# Altium PCB PowerBoard_Rev2.PcbDoc
Units mm, origin at the board's own origin, x right, y up, seen from the top; angles counter-clockwise.
Board outline 76.58 x 61.09 mm, 2 copper layers (Top Layer, Bottom Layer); 50 components, 29 nets, 175 pads, 37 vias.
Unrouted connection lines stored in the file: 1.
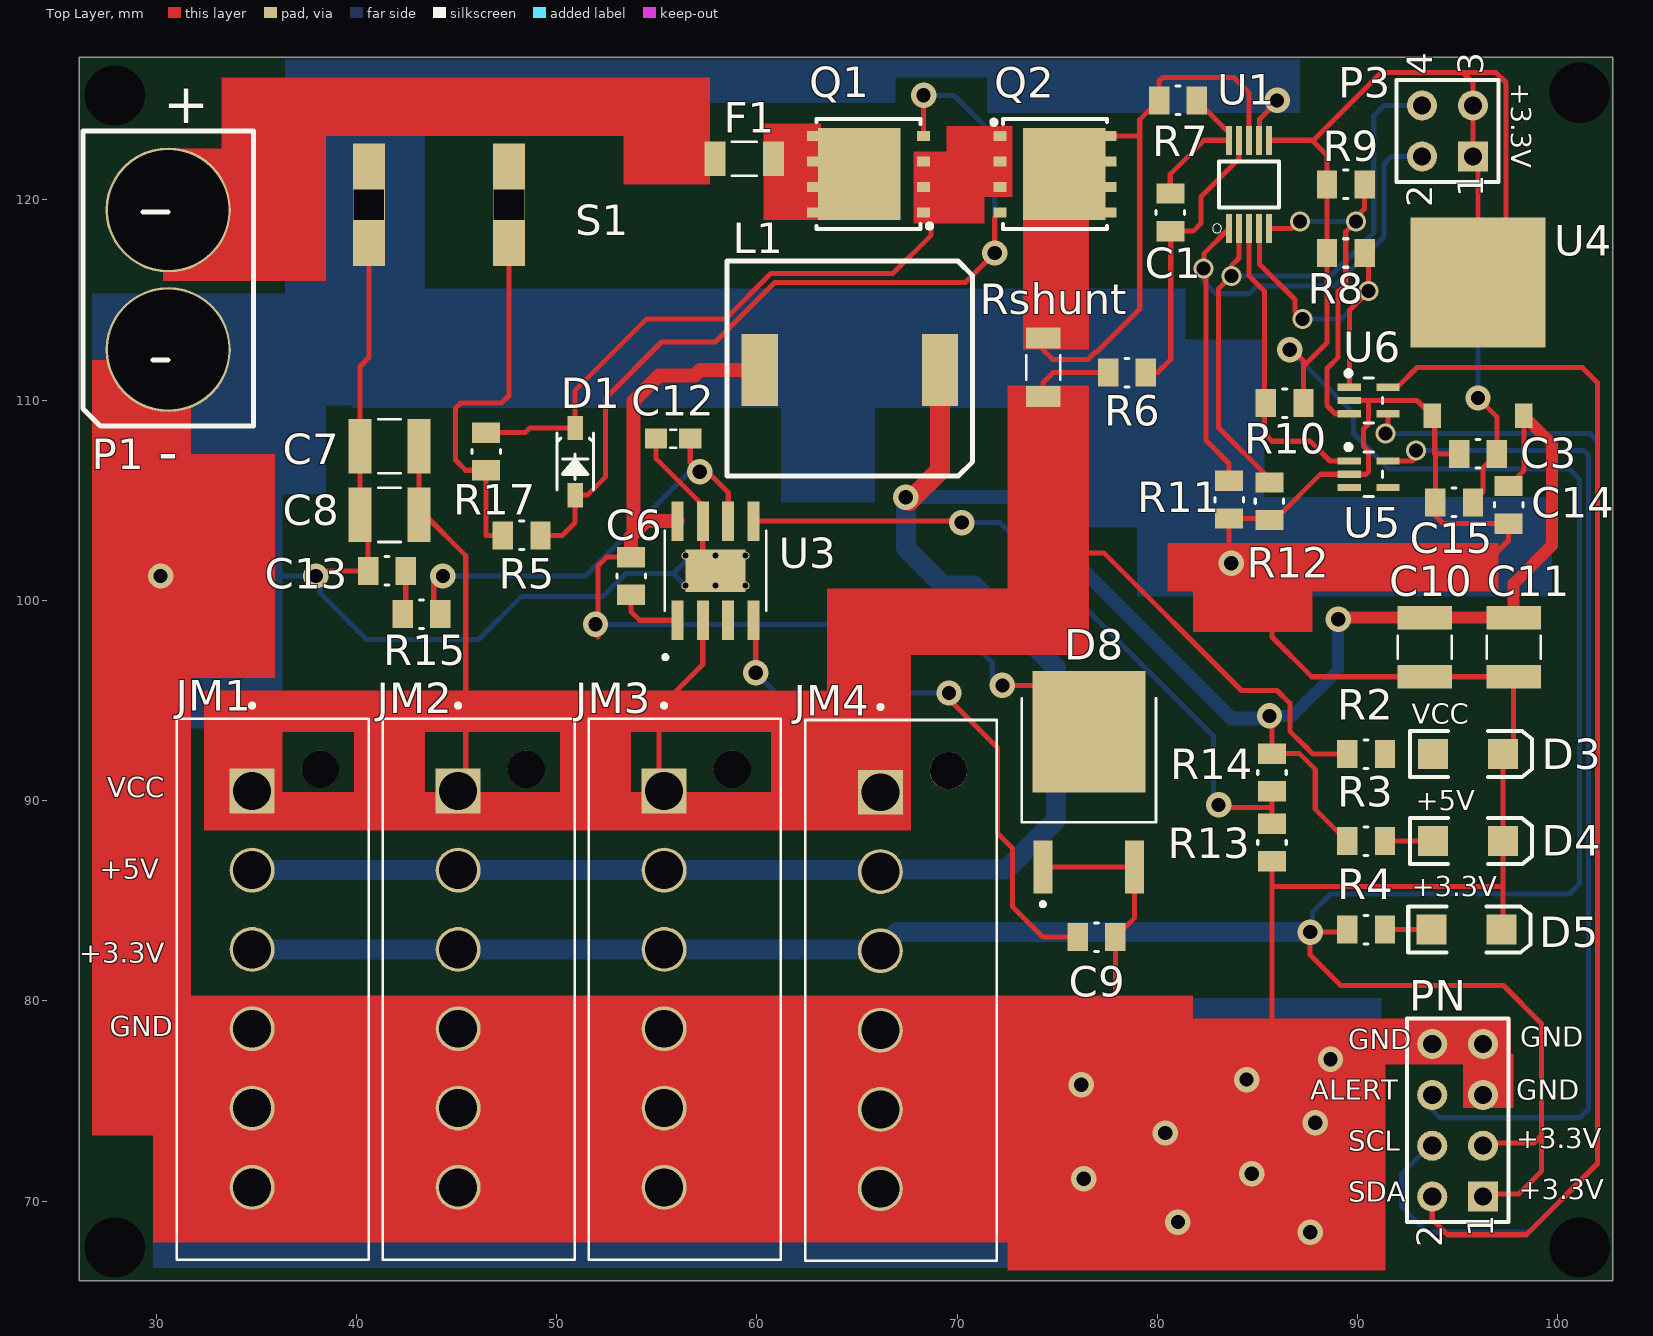
[diagram p0: Top Layer view]
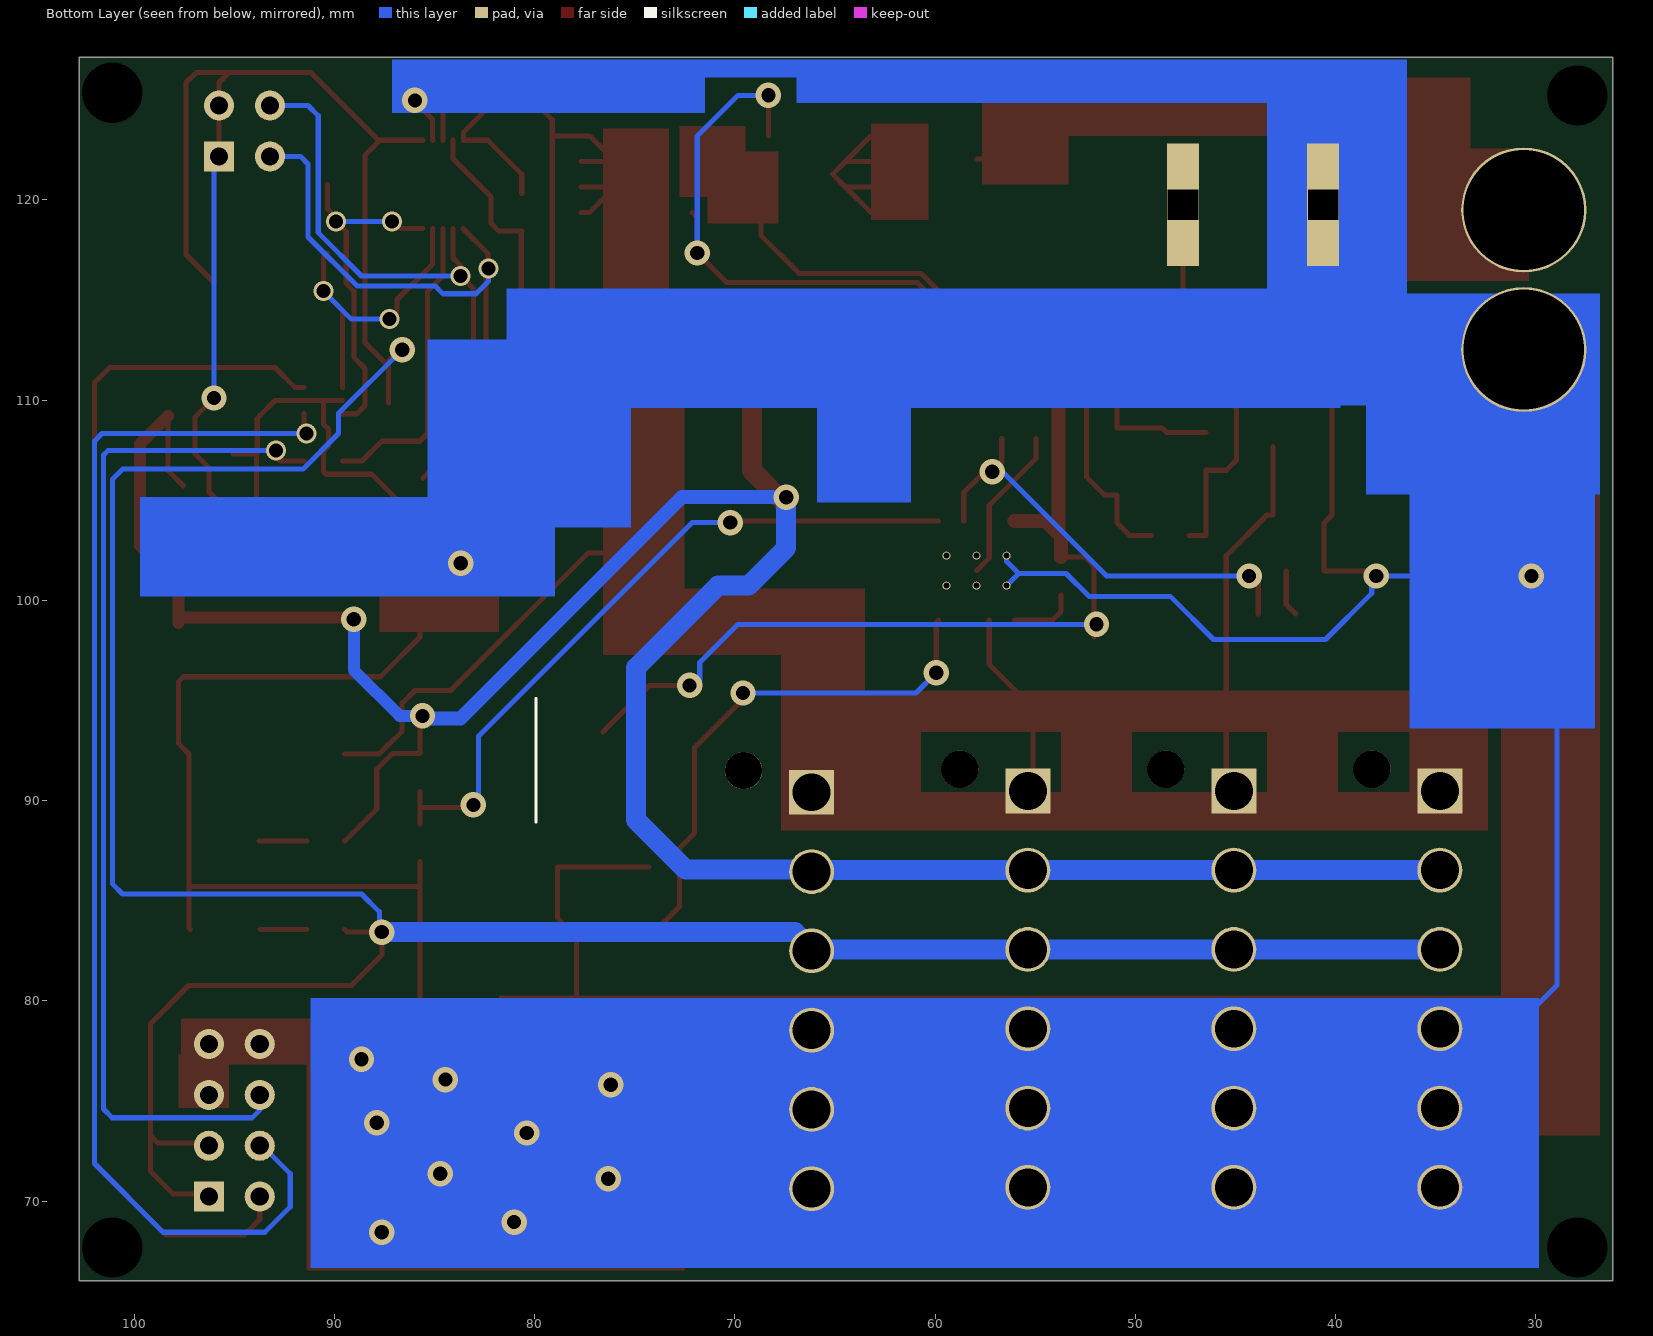
[diagram p1: Bottom Layer view, seen from below]

## Layer stack, top to bottom
Top Solder: solder mask 0.0102, Solder Resist, Dk 3.5
Top Layer: signal copper 0.0356
Dielectric 1: dielectric 0.32, FR-4, Dk 4.8
Bottom Layer: signal copper 0.0356
Bottom Solder: solder mask 0.0102, Solder Resist, Dk 3.5

## Board outline
102.743,127.127 102.743,66.04 26.162,66.04 26.162,127.127

## Design rules (kind name [scope] priority, off if disabled: settings)
Clearance [All] p1: gap=0.2 ignorepadtopadclearanceinfootprint=FALSE except(0: Arc-Hole Track-Hole SMDPad-Hole THPad-Hole Via-Hole Fill-Hole Poly-Hole Region-Hole Text-Hole)
ComponentClearance [All] p1: gap=0.15 collisioncheckmode=3 verticalgap=0.254 showdistances=FALSE
PolygonConnect [All] p1: connectstyle=Relief reliefconductorwidth=0.254 reliefentries=4 polygonreliefangle="90 Angle" airgapwidth=0.254
RoutingVias [All] p1: holewidth=0.711 width=1.27 viastyle="Through Hole" minholewidth=0.5 minwidth=0.8 maxholewidth=4 maxwidth=3
SolderMaskExpansion [All] p1: expansion=0.102
Width [All] p1: maxlimit=2 minlimit=0.2 preferedwidth=0.254
29 further rules are at their usual default settings.

## Components (designator, comment, footprint, x,y, rotation, side; value= is the part's Value field where it differs from the comment)
C1 "100nF" 0805 80.645,119.38 r270 top
C3 "100nF" 0805 96.012,107.315 r0 top
C6 "100nF" 0805 53.721,101.219 r90 top
C7 "10uF" 1210 41.656,107.696 r0 top
C8 "10uF" 1210 41.656,104.267 r0 top
C9 "8.2nF" 0805 76.962,83.185 r0 top
C10 "47uF" 1210 93.345,97.663 r90 top
C11 "47uF" 1210 97.79,97.663 r90 top
C12 "10pF" 0603 55.825,108.077 r0 top
C13 "1nF" 0805 41.529,101.473 r0 top
C14 "4.7uF" 0805 97.536,104.775 r90 top
C15 "4.7uF" 0805 94.818,104.902 r0 top
D1 "MMSZ5245B-TP" SOD-123 50.927,106.934 r270 top
D3 "LED2" 3.2X1.6X1.1 95.504,92.329 r0 top
D4 "LED2" 3.2X1.6X1.1 95.504,87.978 r0 top
D5 "LED2" 3.2X1.6X1.1 95.428,83.566 r0 top
D8 "SBRD10200TR" DPAK 76.581,90.932 r0 top
F1 "Fuse 20A 1206" 1206 59.373,122.047 r0 top
JM1 "CONN HEADER VERT 6POS 3.96MM" "CN HDR 6POS 3.96MM" 34.798,90.493 r270 top (schematic designator JM3)
JM2 "CONN HEADER VERT 6POS 3.96MM" "CN HDR 6POS 3.96MM" 45.085,90.493 r270 top (schematic designator JM1)
JM3 "CONN HEADER VERT 6POS 3.96MM" "CN HDR 6POS 3.96MM" 55.372,90.493 r270 top (schematic designator JM4)
JM4 "CONN HEADER VERT 6POS 3.96MM" "CN HDR 6POS 3.96MM" 66.167,90.424 r270 top (schematic designator JM2)
L1 "SRU1048-8R2Y" Inductor 64.643,111.506 r0 top value=8.2uH
P1 "XT60" XT60Connector 26.357,107.95 r90 top value=N/A
P3 "Header 2X2" HDR2X2 95.758,122.174 r90 top
PN "Header 4X2" HDR2X4 96.266,70.231 r90 top
Q1 "AON6407" 8-PowerSMD 65.576,121.285 r180 top
Q2 "AON6407" 8-PowerSMD 74.886,121.285 r0 top
R2 "1.96K" 0805 90.424,92.329 r0 top value=1.96k
R3 "270" 0805 90.424,87.978 r0 top
R4 "110" 0805 90.424,83.566 r0 top
R5 "100k" 0805 48.26,103.251 r180 top
R6 "10" 0805 78.486,111.379 r180 top
R7 "10" 0805 81.026,124.968 r180 top
R8 "10k" 0805 89.408,117.348 r0 top
R9 "10k" 0805 89.408,120.777 r0 top
R10 "10k" 0805 86.36,109.855 r180 top
R11 "10k" 0805 83.582,105.029 r270 top
R12 "10k" 0805 85.598,104.953 r270 top
R13 "1.96K" 0805 85.725,87.908 r270 top value=1.96k
R14 "10.2k" 0805 85.725,91.407 r270 top
R15 "24.3K" 0805 43.256,99.314 r180 top value=24.3k
R17 "100k" 0805 46.482,107.442 r270 top
Rshunt "2mOhm" 1206 74.295,111.633 r90 top value=0.002
S1 "SPST Rocker" "SWITCH ROCKER SPST 10A 125V" 40.625,119.761 r270 top
U1 "INA226AIDGSR" 10-VSSOP 84.582,120.777 r90 top
U3 "TPS54331" 8-PowerSOIC 57.936,101.485 r90 top
U4 "ZLDO1117K33TC" TO-252-3 96.012,115.722 r0 top
U5 "EMI" SOT-665 90.551,106.299 r0 top
U6 "EMI" SOT-665 90.551,109.982 r0 top

## Footprints (in the part's own frame and the unit in brackets; to place one, negate y for a bottom-side part, rotate by r counter-clockwise, add the part's x,y. Pads: shape width x height; smd on the part's side, far side on the other; paste and mask are expansions set on the pad)
3.2X1.6X1.1 [mm]
  rect 1.5x1.5 smd: 1(-1.75,0) 2(1.75,0)
  silkscreen extent -2.9,-1.15 3.2,1.15
8-PowerSMD [mm]
  rect 4.12x4.6 smd: 9(0.46,0)
  rect 0.55x0.5 smd: D(2.795,1.905) D(2.795,-0.635) D(2.795,0.635) D(2.795,-1.905)
  rect 0.65x0.5 smd: G(-2.75,-1.905) S(-2.75,1.905) S(-2.75,-0.635) S(-2.75,0.635)
  silkscreen extent -3.13,-2.75 2.6,2.75
8-PowerSOIC [mm]
  rect 1.97x0.6 smd: 1(-2.475,1.905) 2(-2.475,0.635) 3(-2.475,-0.635) 4(-2.475,-1.905) 5(2.475,-1.905) 6(2.475,-0.635) 7(2.475,0.635) 8(2.475,1.905)
  rect 2.13x3 smd: 9(0,0)
  round 0.4 hole 0.3: V1(-0.75,1.5) V2(0.75,1.5) V3(-0.75,0) V4(0.75,0) V5(-0.75,-1.5) V6(0.75,-1.5)
  silkscreen extent -4.42,-2.52 2,2.6
10-VSSOP [mm]
  rect 1.45x0.3 smd: 1(-2.2,1) 2(-2.2,0.5) 3(-2.2,0) 4(-2.2,-0.5) 5(-2.2,-1) 6(2.2,-1) 7(2.2,-0.5) 8(2.2,0) 9(2.2,0.5) 10(2.2,1)
  silkscreen extent -2.42,-1.5 1.15,1.82
0603 [mm]
  rect 1.1x1 smd: 1(-0.85,0) 2(0.85,0)
  silkscreen extent -0.15,-0.45 0.15,0.45
0805 [mil]
  rect 40x55 smd: 1(-37,0) 2(37,0)
  silkscreen extent -4,-28 4,28
1206 [mm]
  rect 1.05x1.72 smd: 1(-1.46,0) 2(1.46,0)
  silkscreen extent -0.62,-0.85 0.62,0.85
1210 [mm]
  rect 1.16x2.72 smd: 1(-1.475,0) 2(1.475,0)
  silkscreen extent -0.57,-1.35 0.57,1.35
"CN HDR 6POS 3.96MM" [mm]
  rect 2.24x2.24 hole 1.89: 1(0,0)
  round 2.24 hole 1.89: 2(3.96,0) 3(7.92,0) 4(11.88,0) 5(15.84,0) 6(19.8,0)
  round 1.86 hole 1.86 unplated: None(-1.08,3.4)
  silkscreen extent -4.35,-3.76 23.41,5.82
DPAK [mm]
  rect 0.95x2.64 smd: 1(-2.286,-4.24) 3(2.286,-4.24)
  rect 5.63x6.09 smd: 2(0,2.51)
  silkscreen extent -3.35,-6.2 3.35,4.19
HDR2X2 [mm] "Connector; Header; 2x2 Position"
  rect 1.5x1.5 hole 0.9: 1(0,0)
  round 1.5 hole 0.9: 2(0,2.54) 3(2.54,0) 4(2.54,2.54)
  silkscreen extent -1.27,-1.27 3.81,3.81
HDR2X4 [mm] "Connector; Header; 4x2 Position"
  rect 1.5x1.5 hole 0.9: 1(0,0)
  round 1.5 hole 0.9: 2(0,2.54) 3(2.54,0) 4(2.54,2.54) 5(5.08,0) 6(5.08,2.54) 7(7.62,0) 8(7.62,2.54)
  silkscreen extent -1.27,-1.27 8.89,3.81
Inductor [mil]
  rect 71x142 smd: 1(-177,0) 2(177,0)
  silkscreen extent -242,-208 242,214
SOD-123 [mil]
  rect 48x30 smd: A(66,0) C(-66,0)
  silkscreen extent -56,-36 56,36
SOT-665 [mil]
  rect 46x14 smd: 1(-38,26) 2(-38,0) 3(-38,-26) 4(38,-26) 5(38,26)
  silkscreen extent -45,-44 27,59
"SWITCH ROCKER SPST 10A 125V" [mm]
  rect 6.1x1.6 hole 1.5 square: 0(0,0) 1(0,7)
  body extent -7.3,-3.1 7.3,15.9, height 13.69
TO-252-3 [mil]
  rect 35x48 smd: 1(-90,-256) 3(90,-256)
  rect 265x256 smd: 2(0,6)
XT60Connector [mm]
  round 6.25 hole 6: 1(4.572,-4.25) 2(11.55,-4.25)
  silkscreen extent 0.76,-8.5 15.5,0

## Part data
C1 C3 C6: library part "CAP 100nF 0805", "CAP CER 0.1UF 50V X7R 0805", Package=0805, Rating=50V, Tolerance=10%, Digikey=311-1140-1-ND, Digikey Link=https://www.digikey.ca/products/en?keywords=311-1140-1-ND, MF=Yageo, MP=CC0805KRX7R9BB104, Price="0,119 CAD"
C7 C8: library part "CAP 10uF 1210", "CAP CER 10UF 50V X7R 1210", Package=1210, Rating=50V, Tolerance=10%, ComponentLink1Description=digikey, ComponentLink1URL=https://www.digikey.ca/en/products/detail/kemet/C1210C106M5RACTU/4918883, Digikey=1276-3388-1-ND, Digikey Link=https://www.digikey.ca/product-detail/en/samsung-electro-mechanics/CL32B106KBJNNWE/1276-3388-1-ND/3891474, MF="Samsung Electro-Mechanics", MP=CL32B106KBJNNWE, Price="0.95 CAD"
C9: library part "CAP 8.2nF 0805", "CAP CER 8200PF 50V X7R 0805", Package=0805, Rating=50V, Tolerance=10%, Digikey=399-9275-1-ND, Digikey Link=https://www.digikey.ca/product-detail/en/kemet/C0805C822K5RACTU/399-9275-1-ND/3522793, MF=KEMET, MP=C0805C822K5RACTU, Price="0,17 CAD"
C10 C11: library part "CAP 47uF 1210", "CAP CER 47UF 6.3V X7R 1210", Package=1210, Rating=6.3V, Tolerance=10%, ComponentLink1Description=digikey, ComponentLink1URL=https://www.digikey.ca/en/products/detail/kemet/C1210C106M5RACTU/4918883, Digikey=490-4844-1-ND, Digikey Link=https://www.digikey.ca/product-detail/en/murata-electronics/GCM32ER70J476KE19L/490-4844-1-ND/1763982, MF="Murata Electronics", MP=GCM32ER70J476KE19L, Price="1.68 CAD"
C12: library part "CAP 10pF 0603", "CAP CER SMD 0603 10PF 10% X7R 50", Package=0603, Rating=50V, Tolerance=10%, ComponentLink1Description=digikey, ComponentLink1URL=https://www.digikey.ca/en/products/detail/kemet/C0603C100K5RAC7867/8572397, Digikey=399-17562-1-ND, Digikey Link=https://www.digikey.ca/product-detail/en/kemet/C0603C100K5RAC7867/399-17562-1-ND/8572562, MF=KEMET, MP=C0603C100K5RAC7867, Price="0.4 CAD"
C13: library part "CAP 1nF 0805", "CAP CER 1000PF 50V X7R 0805", Package=0805, Rating=50V, Tolerance=10%, Digikey=311-1127-1-ND, Digikey Link=https://www.digikey.ca/products/en?keywords=311-1127-1-ND, MF=Yageo, MP=CC0805KRX7R9BB102, Price="0.1 CAD"
C14 C15: library part "CAP 4.7uF 0805", "CAP CER 4.7UF 25V X5R 0805", Package=0805, Rating=16V, Temperature Coefficient=X7R, Tolerance=10%, Digikey=1276-2873-1-ND, Digikey Link=https://www.digikey.ca/product-detail/en/samsung-electro-mechanics/CL21B475KOFNNNE/1276-2873-1-ND/3890959, MF="Samsung Electro-Mechanics", MP=CL21B475KOFNNNE, Price="0,49 CAD"
D1: "Zener Diode 15V 500mW ±5% Surface Mount SOD-123", Package="SOD-123 ON Semiconductor", Availability=Unavailable, ComponentLink1Description=digikey, ComponentLink1URL=https://www.digikey.ca/en/products/detail/micro-commercial-co/MMSZ5245B-TP/1793206, MF="ON Semiconductor", MP=MMSZ5224BT1G, Price=None, SnapEDA_Link=https://www.snapeda.com/parts/MMSZ5224BT1G/ON%20Semiconductor/view-part/230941/?ref=snap
D3 D4 D5: library part "LED GREEN SMD", "Typical RED, GREEN, YELLOW, AMBER GaAs LED", Package=0603, Rating=2V, Digikey=160-1446-1-ND, Digikey Link=https://www.digikey.ca/products/en?keywords=160-1446-1-ND, MF="Lite-On Inc.", MP=LTST-C191KGKT
D8: "Diode Schottky 200V 10A Surface Mount DPAK", Package="TO-252-3 SMC", ComponentLink1Description=digikey, ComponentLink1URL=https://www.digikey.ca/product-detail/en/smc-diode-solutions/SBRD10200TR/1655-1939-1-ND/8625508, Digikey=1655-1939-1-ND, Digikey Link=https://www.digikey.ca/product-detail/en/smc-diode-solutions/SBRD10200TR/1655-1939-1-ND/8625508, MF="SMC Diode", MP=SBRD10200TR, SnapEDA_Link=https://www.snapeda.com/parts/SBRD10200TR/SMC%20Diode%20Solutions/view-part/702246/?ref=snap
F1: "FUSE BOARD MOUNT 20A 32VAC 63VDC", Rating=20A, Digikey=486-1689-6-ND, Digikey Link=https://www.digikey.ca/product-detail/en/schurter-inc/3413.0331.22/486-1689-6-ND/2870024, MF="Schurter Inc.", MP=3413.0331.22
JM1 JM2 JM3 JM4: "Connector Header Through Hole 6 position 0.156\" (3.96mm)", Current Rating=7.5A, Voltage Rating=250VAC, Digikey=https://www.digikey.ca/product-detail/en/te-connectivity-amp-connectors/1877285-6/A99849-ND/2000097, Digikey Link=A99849-ND, MF="TE Connectivity", MP=1877285-6, SnapEDA_Link=https://www.snapeda.com/parts/1877285-6/TE%20Connectivity/view-part/2371244/?ref=snap
L1: "FIXED IND 8.2UH 4.6A 15 MOHM SMD", Package=Nonstandard, ComponentLink1Description=digikey, ComponentLink1URL=https://www.digikey.ca/en/products/detail/bourns-inc/SRU1048-8R2Y/2352912, Digikey=SRU1048-8R2YCT-ND, Digikey Link=https://www.digikey.ca/en/products/detail/bourns-inc/SRU1048-8R2Y/2352912, MF="Bourns Inc.", MP=SRU1048-8R2Y, Price=None
P1: library part "XT60 Connector", "XT60 CONNECTORS FEMALE PAIR", Digikey=1568-1816-ND, Digikey Link=https://www.digikey.ca/product-detail/en/sparkfun-electronics/PRT-10474/1568-1816-ND/8258064, MF="SparkFun Electronics", MP=PRT-10474, Package=XT60, Price="2.13000 CAD"
P3: "Header, 2-Pin, Dual row", LatestRevisionDate=17-Jul-2002, LatestRevisionNote="Re-released for DXP Platform.", Publisher="Altium Limited"
PN: "Header, 4-Pin, Dual row", LatestRevisionDate=17-Jul-2002, LatestRevisionNote="Re-released for DXP Platform.", Publisher="Altium Limited"
Q1 Q2: "P-Channel 30V 32A (Ta), 85A (Tc) 7.3W (Ta), 83W (Tc) Surface Mount 8-DFN (5x6)", Package=8-PowerSMD, Digikey=785-1421-1-ND, Digikey Link=https://www.digikey.ca/product-detail/en/alpha-omega-semiconductor-inc/AON6407/785-1421-1-ND/3466800, MF="Alpha & Omega Semiconductor Inc.", MP=AON6407
R2 R13: library part "RES 1.96k 0805", "RES SMD 1.96K OHM 1% 1/8W 0805", Package=0805, Rating=0.125W, Tolerance=1%, Digikey=P1.96KCCT-ND, Digikey Link=https://www.digikey.ca/product-detail/en/panasonic-electronic-components/ERJ-6ENF1961V/P1.96KCCT-ND/119041, MF="Panasonic Electronic Components", MP=ERJ-6ENF1961V, Price="0.15 CAD"
R3: library part "RES 270 0805", "RES SMD 270 OHM 5% 1/8W 0805", Package=0805, Rating=0.125W, Digikey=311-270ARCT-ND, Digikey Link=https://www.digikey.ca/product-detail/en/yageo/RC0805JR-07270RL/311-270ARCT-ND/731238, MF=Yageo, MP=RC0805JR-07270RL, Price="0.054 CAD"
R4: library part "RES 110 0805", "RES SMD 110 OHM 1% 1/8W 0805", Package=0805, Rating=0.125W, Tolerance=1%, Digikey=311-110CRCT-ND, Digikey Link=https://www.digikey.ca/product-detail/en/yageo/RC0805FR-07110RL/311-110CRCT-ND/730506, MF=Yageo, MP=RC0805FR-07110RL, Price="0.15 CAD"
R5 R17: library part "RES 100k 0805", "RES SMD 100K OHM 1% 1/8W 0805", Package=0805, Rating=0.125W, Tolerance=1%, Digikey=311-100KCRCT-ND, Digikey Link=https://www.digikey.ca/products/en?keywords=311-100KCRCT-ND, MF=Yageo, MP=RC0805FR-07100KL, Price="0.058 CAD"
R6 R7: library part "RES 10 0805", "RES SMD 10 OHM 1% 1/8W 0805", Package=0805, Rating=0.125W, Tolerance=1%, Digikey=311-10.0CRCT-ND, Digikey Link=https://www.digikey.ca/product-detail/en/yageo/RC0805FR-0710RL/311-10.0CRCT-ND/730481, MF=Yageo, MP=RC0805FR-0710RL, Price="0.15 CAD"
R8 R9 R10 R11 R12: library part "RES 10k 0805", "RES SMD 10K OHM 1% 1/8W 0805", Package=0805, Rating=0.125W, Tolerance=1%, Digikey=311-10.0KCRCT-ND, Digikey Link=https://www.digikey.ca/products/en?keywords=311-10.0KCRCT-ND, MF=Yageo, MP=RC0805FR-0710KL, Price="0.061 CAD"
R14: library part "RES 10.2k 0805", "RES SMD 10.2K OHM 1% 1/8W 0805", Package=0805, Rating=0.125W, Tolerance=1%, ComponentLink1Description=digikey, ComponentLink1URL=https://www.digikey.ca/en/products/detail/panasonic-electronic-components/ERJ-6ENF1022V/111476, Digikey=P10.2KCCT-ND, Digikey Link=https://www.digikey.ca/product-detail/en/panasonic-electronic-components/ERJ-6ENF1022V/P10.2KCCT-ND/119251, MF="Panasonic Electronic Components", MP=ERJ-6ENF1022V, Price="0.15 CAD"
R15: library part "RES 24.3k 0805", "RES SMD 24.3K OHM 1% 1/8W 0805", Package=0805, Rating=0.125W, Tolerance=1%, Digikey=311-24.3KCRCT-ND, Digikey Link=https://www.digikey.ca/product-detail/en/yageo/RC0805FR-0724K3L/311-24.3KCRCT-ND/730705, MF=Yageo, MP=RC0805FR-0724K3L, Price="0.15 CAD"
Rshunt: library part "RES 2mOhm 1206", "RES 0.002 OHM 1% 1W 1206", Package=1206, Rating=0.125W, Digikey=696-1370-1-ND, Digikey Link=https://www.digikey.ca/product-detail/en/riedon/CSR1206-0R002F1/696-1370-1-ND/2813303, MF=Riedon, MP=CSR1206-0R002F1, Price="0.88 CAD"
S1: library part "SWITCH ROCKER SPST 10A 125V", "Rocker Switch SPST 10A (AC) 125V Panel Mount, Snap-In", Rating="10A 125V", Digikey=CH755-ND, Digikey Link=https://www.digikey.ca/product-detail/en/zf-electronics/SRB22A2FBBNN/CH755-ND/446021, MF="ZF Electronics", MP=SRB22A2FBBNN, Price="1.276 CAD"
U1: "36-V, Bi-Directional, Ultra-High Accuracy, Low-/High-Side, I2C Out Current/Power Monitor w/ Alert 10-VSSOP -40 to 125", Package="MSOP-10 Texas Instruments", Availability=Unavailable, Digikey=296-29034-2-ND, Digikey Link=https://www.digikey.ca/product-detail/en/texas-instruments/INA226AIDGSR/296-29034-2-ND/2687236, MF="Texas Instruments", MP=INA226AIDGSR, Price=None, SnapEDA_Link=https://www.snapeda.com/parts/INA226AIDGSR/Texas%20Instruments/view-part/53552/?ref=snap
U3: "Buck Switching Regulator IC Positive Adjustable 0.8V 1 Output 3A 8-SOIC _0.154, 3.90mm Width_", Package=8-PowerSOIC, Digikey=296-39419-1-ND, Digikey Link=https://www.digikey.ca/product-detail/en/texas-instruments/TPS54331DDAR/296-39419-1-ND/5143369, MF="Texas Instruments", MP=TPS54331DDAR, SnapEDA_Link=https://www.snapeda.com/parts/TPS54331/Texas%20Instruments/view-part/568919/?ref=snap
U4: "Linear Voltage Regulator IC Positive Fixed 1 Output  1A TO-252-3", Package=TO-252-3, Digikey=ZLDO1117K33DIDKR-ND, Digikey Link=https://www.digikey.ca/product-detail/en/diodes-incorporated/ZLDO1117K33TC/ZLDO1117K33DIDKR-ND/2095639, MF="Diodes Incorporated", MP=ZLDO1117K33TC
U5 U6: library part IP4256CZ5-W, "RC (Pi) EMI Filter 2nd Order Low Pass 2 Channel R = 100Ohms, C = 19pF (Total)  SOT-665", Package=SOT-665, Digikey=1727-4718-1-ND, Digikey Link=https://www.digikey.ca/product-detail/en/nexperia-usa-inc/IP4256CZ5-W115/1727-4718-1-ND/2531158, MF="Nexperia USA Inc.", MP=IP4256CZ5-W,115, Price="0.17 CAD", SnapEDA_Link=https://www.snapeda.com/parts/IP4256CZ5-W/Nexperia%20USA%20Inc./view-part/3605439/?ref=snap

## Free pads (board coordinates)
  round 1.524 hole 3: 6(27.94,67.691) 6(27.94,125.222) 6(101.092,67.691) 6(101.092,125.349)

## Via types
v1: diameter 1.27, hole 0.711, Top Layer to Bottom Layer, 29 vias
v2: diameter 1, hole 0.7, Top Layer to Bottom Layer, 8 vias

## Nets (pads, with @x,y where several pads share a name; then routed paths per layer and width w, separated by ;. In a path a pad name is that pad's centre, name@x,y a point inside that pad or via, vN(x,y) a via of type N, cw(c..) or ccw(c..) an arc to the next point about the centre after c; other vN are vias at no path point)
+3.3V: C3.2 C15.2 JM1.3 JM2.3 JM3.3 JM4.3 P3.1 P3.3 PN.1 PN.3 R4.1 R8.1 R9.1 R10.1 U1.6 U4.2 | length 204.5
  Top Layer w0.254: U1.6 87.716,122.977 ; v1@86.868,112.395 87.3,111.963 87.3,111.693 ; R10.1 87.3,111.693 ; R4.1 89.357,83.439 v1(87.63,83.439) 87.63,82.296 89.154,80.772 97.282,80.772 99.187,78.867 99.187,73.279 ; C15.2 96.266,105.41 96.266,106.629 C3.2 96.952,109.169 v1(96.012,110.109) ; PN.1@96.266,70.866 96.266,70.358 98.044,70.358 99.187,71.501 99.187,73.279 ; PN.3@96.266,72.39 96.266,72.898 98.806,72.898 99.187,73.279 ; 87.3,111.693 88.468,112.862 R8.1 R9.1 88.468,122.225 87.716,122.977 ; 87.716,122.977 87.798,122.977 91.186,126.365 95.25,126.365 ; 95.25,126.365 96.901,126.365 97.409,125.857 97.409,117.272 U4.2 96.012,121.92 P3.1 P3.3 95.758,125.857 95.25,126.365
  Bottom Layer w0.254: JM4.3@65.763,82.573 65.786,82.596 JM4.3@66.167,82.596 ; v1(86.614,112.522) 89.789,109.347 89.789,108.331 91.567,106.553 100.584,106.553 101.073,106.064 101.073,85.833 100.584,85.344 88.646,85.344 87.757,84.455 v1@87.757,83.693 ; P3.1 96.012,121.92 v1(96.012,110.109)
  Bottom Layer w1: JM1.3 JM2.3 JM3.3 JM4.3@65.763,82.573 ; JM4.3@66.167,82.596 67.01,83.439 v1(87.63,83.439)
+5V: C10.2 C11.2 C14.2 JM1.2 JM2.2 JM3.2 JM4.2 L1.2 R3.1 R14.1 U4.3 | length 131
  Top Layer w0.254: v1(85.598,94.234) 85.725,94.107 R14.1 87.104,92.347 87.884,91.567 87.884,89.578 R3.1 ; v1(89.027,99.06) v1@89.105,99.138 ; C11.2@97.536,99.138 C11.2@97.79,98.884 ; C14.2 98.298,106.477 U4.3
  Top Layer w0.6: v1@89.105,99.138 C10.2 C11.2@97.536,99.138 ; C11.2@97.79,98.884 97.79,100.838 99.695,102.743 99.695,107.823 U4.3
  Top Layer w1: v1@67.627,104.965 69.139,106.477 L1.2
  Bottom Layer w0.254: JM4.2@65.763,86.533 JM4.2@65.786,86.556
  Bottom Layer w0.6: v1(85.598,94.234) 86.741,94.234 89.027,96.52 v1(89.027,99.06)
  Bottom Layer w0.7: v1(67.437,105.156) 72.644,105.156 83.693,94.107 v1@85.344,94.107
  Bottom Layer w1: JM1.2 JM2.2 JM3.2 JM4.2@65.763,86.533 ; JM4.2@65.786,86.556 72.459,86.556 74.93,89.027 74.93,96.647 70.842,100.735 69.318,100.735 67.437,102.616 v1(67.437,105.156)
+VBAT: F1.1 P1.2 | length 33.1
  Top Layer w0.254: P1.2@30.099,119.246 30.36,119.507 34.62,119.507 36.195,121.082 36.195,123.571 37.846,125.222 53.086,125.222 56.261,122.047 F1.1
A0_SEL: P3.4 R12.1 U1.2 | length 30.4
  Top Layer w0.254: 84.074,117.102 84.074,117.094 83.693,116.713 v2(83.693,116.205) 83.058,115.57 83.058,108.62 R12.1@85.582,106.096 ; 84.082,117.102 U1.2
  Bottom Layer w0.254: v2(83.693,116.205) 88.646,116.205 90.805,118.364 90.805,124.206 91.313,124.714 P3.4
A1_SEL: P3.2 R11.1 U1.1 | length 30.2
  Top Layer w0.254: v2(82.296,116.586) 82.423,116.459 82.423,108.001 83.582,106.842 R11.1 ; v2@82.337,116.84 82.337,117.332 U1.1
  Bottom Layer w0.254: v2(82.296,116.586) 82.296,115.951 82.931,115.316 84.582,115.316 84.963,115.697 88.856,115.697 91.313,118.154 91.313,121.793 91.694,122.174 P3.2
GND: C3.1 C7.1 C8.1 C9.2 C10.1 C11.1 C12.1 C13.1 C14.1 C15.1 D3.2 D4.2 D5.2 D8.1 D8.3 JM1.4 JM1.5 JM1.6 JM2.4 JM2.5 JM2.6 JM3.4 JM3.5 JM3.6 JM4.4 JM4.5 JM4.6 P1.1 PN.5 PN.7 PN.8 R11.2 R12.2 R13.2 S1.0 U1.7 U3.7 U3.9 U3.V1 U3.V2 U3.V3 U3.V4 U3.V5 U3.V6 U4.1 U5.2 U6.2 | length 292
  Top Layer w0.254: v1(37.973,101.219) 38.227,101.473 C13.1 40.589,103.859 C8.1 C7.1 40.181,111.682 40.625,112.126 S1.0 ; C12.1 54.975,107.077 57.301,104.751 U3.7 57.301,102.12 U3.9 ; JM4.4@65.786,78.636 65.786,74.676 65.786,70.716 74.572,70.716 77.902,74.046 C9.2 78.867,84.15 D8.3 D8.1 ; v1@83.582,101.377 R11.2 85.455,104.089 85.582,104.216 86.055,104.216 88.138,106.299 U5.2 90.424,106.299 90.551,106.426 90.551,107.442 90.297,107.696 90.297,108.56 90.551,108.814 90.551,109.982 ; U1.7 85.105,123 85.105,124.029 v1@85.852,124.776 ; 85.725,78.613 85.725,85.725 ; R13.2 85.725,85.725 ; U6.2 90.551,109.982 ; 90.551,76.962 91.567,77.978 93.726,77.978 96.266,77.978 PN.5@96.266,75.438 ; C3.1 93.853,107.315 ; D5.2 97.254,83.642 97.254,85.725 ; 85.725,85.725 97.254,85.725 ; 90.551,109.982 92.964,109.982 U4.1 93.853,109.093 93.853,107.315 ; 93.853,107.315 93.878,107.29 C15.1 93.878,104.242 94.285,103.835 C14.1 97.536,102.997 95.758,101.219 86.487,101.219 85.725,100.457 85.725,98.171 87.708,96.188 C10.1 97.536,96.188 97.79,95.934 97.79,92.865 D3.2 D4.2 97.254,85.725
  Bottom Layer w0.254: P1.1 28.956,110.871 28.956,101.346 ; JM1.4 31.115,78.613 28.956,80.772 28.956,101.346 ; v1(37.973,101.219) 29.083,101.219 28.956,101.346 ; v1@38.198,101.092 38.198,100.359 40.513,98.044 46.101,98.044 48.26,100.203 52.324,100.203 53.467,101.346 55.825,101.346 ; S1.0 40.625,124.826 42.164,126.365 71.755,126.365 73.152,124.968 v1(85.979,124.968) ; U3.V1 55.825,101.346 ; U3.V2 56.436,101.957 55.825,101.346
  other v1: 87.63,68.453 81.026,68.961 76.327,71.12 84.709,71.374 80.391,73.406 87.884,73.914 76.2,75.819 84.455,76.073 88.646,77.089 30.226,101.219 83.693,101.854
NetC1_1: C1.1 R7.1 U1.10 | length 7.2
  Top Layer w0.254: C1.1 80.645,121.285 82.337,122.977 83.551,122.977 83.551,123.383 R7.1
NetC1_2: C1.2 R6.1 U1.9 | length 14.6
  Top Layer w0.254: R6.1 80.01,111.379 80.67,112.039 80.67,118.415 C1.2 81.788,118.44 82.169,118.821 82.169,120.142 84.082,122.055 U1.9
NetC6_1: C6.1 U3.1 | length 3.3
  Top Layer w0.254: C6.1 53.721,99.441 54.152,99.01 U3.1
NetC6_2: C6.2 D8.2 L1.1 U3.8 | length 49.7
  Top Layer w0.254: 52.07,98.171 52.07,101.727 52.502,102.159 C6.2 ; 53.721,103.201 53.848,103.328 ; v1(72.263,95.758) 74.265,95.758 D8.2
  Top Layer w0.7: C6.2 53.721,103.201 ; U3.8 54.48,103.96 53.848,103.328 53.848,109.957 55.124,111.233 56.891,111.233 57.164,111.506 L1.1
  Bottom Layer w0.254: v1(51.943,98.806) 69.85,98.806 71.755,96.901 71.755,96.012 v1@72.009,95.758
NetC9_1: C9.1 U3.4 | length 28.1
  Top Layer w0.254: U3.4 59.944,98.907 v1(59.944,96.393) ; v1@69.723,94.943 72.009,92.657 72.009,88.392 72.771,87.63 72.771,84.709 74.295,83.185 C9.1
  Bottom Layer w0.254: v1(59.944,96.393) 60.96,95.377 v1(69.596,95.377)
NetC12_2: C12.2 R15.1 U3.6 | length 21.8
  Top Layer w0.254: R15.1@43.866,99.314 v1@43.866,101.041 ; C12.2 56.675,106.901 v1(57.15,106.426) 57.531,106.426 58.571,105.386 U3.6
  Bottom Layer w0.254: v1(44.323,101.219) 51.435,101.219 56.642,106.426 v1(57.15,106.426)
NetC13_2: C13.2 R15.2 | length 2.4
  Top Layer w0.254: R15.2@41.986,99.314 42.469,99.797 C13.2
NetD1_A: D1.A Q1.G Q2.G R5.1 | length 45.8
  Top Layer w0.254: R5.1 50.292,103.251 50.927,103.886 D1.A 51.537,105.258 52.451,106.172 52.451,110.109 55.245,112.903 57.919,112.903 60.894,115.878 70.412,115.878 v1(71.882,117.348) 71.882,119.126 Q2.G ; Q1.G v1(68.326,125.222)
  Bottom Layer w0.254: v1@68.58,125.222 69.85,125.222 71.882,123.19 v1(71.882,117.348)
NetD1_C: D1.C Q1.S Q2.S R17.1 | length 41.6
  Top Layer w0.254: R17.1 48.438,108.382 48.666,108.61 D1.C 50.927,110.49 54.483,114.046 58.42,114.046 60.706,116.332 66.802,116.332 68.707,118.237 68.707,119.38 ; Q1.S@68.326,119.38 68.707,119.38 ; Q1.S@68.326,120.65 69.469,120.65 70.739,121.92 Q2.S@72.136,121.92 ; Q1.S@68.326,121.92 69.215,121.92 70.485,123.19 Q2.S@72.136,123.19 ; Q2.S@72.136,120.65 70.866,120.65 69.596,119.38 68.707,119.38
NetD3_1: D3.1 R2.2
NetD4_1: D4.1 R3.2 | length 2.4
  Top Layer w0.254: R3.2 D4.1
NetD5_1: D5.1 R4.2 | length 2.3
  Top Layer w0.254: R4.2 D5.1
NetF1_2: F1.2 Q1.9 Q1.D | length 11.6
  Top Layer w0.254: F1.2 62.654,122.047 62.781,121.92 Q1.9@64.481,121.92 ; Q1.D@62.781,119.38 63.211,119.38 Q1.9@64.481,120.65 ; Q1.D@62.781,120.65 Q1.9@64.481,120.65 ; Q1.D@62.781,123.19 63.211,123.19 Q1.9@64.481,121.92 ; Q1.9@64.481,120.65 Q1.9 Q1.9@64.481,121.92
NetR5_2: R5.2 R17.2 S1.1 | length 20.9
  Top Layer w0.254: R5.2 46.482,103.251 R17.2 45.466,106.502 44.958,107.01 44.958,109.601 45.212,109.855 47.244,109.855 47.625,110.236 S1.1
PM_ALERT: PN.6 U5.5 | length 52
  Top Layer w0.254: U5.5 92.71,106.959 92.837,107.086 v2@92.837,107.29
  Bottom Layer w0.254: v2(92.913,107.477) 101.311,107.477 101.527,107.261 101.527,74.603 101.092,74.168 94.107,74.168 93.726,74.549 PN.6@93.726,75.438
PM_SCL: PN.4 U6.4 | length 63
  Top Layer w0.254: v2@91.516,108.687 U6.4
  Bottom Layer w0.254: v2(91.389,108.331) 101.6,108.331 101.981,107.95 101.981,71.882 98.552,68.453 93.472,68.453 92.202,69.723 92.202,71.374 PN.4@93.726,72.898
PM_SDA: PN.2 U6.5 | length 61.5
  Top Layer w0.254: U6.5 91.973,110.642 92.964,111.633 101.219,111.633 101.981,110.871 101.981,71.882 98.425,68.326 94.488,68.326 93.726,69.088 PN.2@93.726,70.358
PMS_ALERT: R10.2 U1.3 U5.1 | length 15.4
  Top Layer w0.254: U1.3 84.582,116.205 85.344,115.443 85.344,108.331 85.725,107.95 87.63,107.95 88.621,106.959 U5.1
PMS_SCL: R9.2 U1.5 U6.3 | length 17.4
  Top Layer w0.254: U1.5 86.7,118.577 v2@87.122,118.999 ; U6.3 88.875,109.322 88.468,109.728 88.468,111.582 89.027,112.141 89.027,115.443 89.408,115.824 89.408,118.415 v2(89.916,118.923) 89.916,119.126 90.348,119.558 R9.2
  Bottom Layer w0.254: v2(87.122,118.923) v2@89.713,118.923
PMS_SDA: R8.2 U1.4 U6.1 | length 16.1
  Top Layer w0.254: U1.4 85.105,118.554 85.105,116.791 86.868,115.028 86.868,114.427 v2@87.122,114.173 ; U6.1 89.586,114.478 v2(90.551,115.443) 90.551,117.145 R8.2
  Bottom Layer w0.254: v2(87.249,114.046) 89.154,114.046 v2@90.424,115.316
VCC: C7.2 C8.2 JM1.1 JM2.1 JM3.1 JM4.1 R2.1 R6.2 Rshunt.1 U3.2 | length 52.5
  Top Layer w0.254: JM1.1 36.264,89.027 ; C7.2 C8.2 43.434,104.267 45.466,102.235 45.466,90.874 JM2.1 ; JM3.1 55.118,90.493 55.118,94.615 57.301,96.798 U3.2 ; Rshunt.1 74.295,110.871 74.803,111.379 R6.2 ; 76.327,102.362 77.343,102.362 84.201,95.504 85.979,95.504 86.614,94.869 86.614,93.472 87.285,92.801 87.292,92.801 87.764,92.329 R2.1
VCC_RPP: Q2.9 Q2.D R7.2 Rshunt.2 U1.8 | length 36.8
  Top Layer w0.254: Rshunt.2 74.295,112.522 74.778,112.039 76.538,112.039 76.903,112.404 76.971,112.404 79.121,114.554 79.121,123.19 ; Q2.D@77.681,119.38 77.251,119.38 Q2.9@75.981,120.65 ; Q2.D@77.681,120.65 Q2.9@75.981,120.65 ; Q2.D@77.681,121.92 Q2.9@75.981,121.92 ; U1.8 84.582,125.349 83.82,126.111 80.264,126.111 80.086,125.933 R7.2 79.121,124.003 79.121,123.19 ; Q2.9@75.981,120.65 Q2.9 Q2.9@75.981,121.92 ; Q2.9@75.981,121.92 77.251,123.19 77.681,123.19 79.121,123.19
VSENSE: R13.1 R14.2 U3.5 | length 34.6
  Top Layer w0.254: U3.5 v1@69.924,103.96 ; v1(83.058,89.789) 83.19,89.657 85.725,89.657 ; R13.1 85.725,89.657 ; R14.2 85.725,89.657
  Bottom Layer w0.254: v1(70.231,103.886) 72.136,103.886 82.804,93.218 82.804,90.17 v1@82.931,90.043
pads on no net: JM1.None JM2.None JM3.None JM4.None U3.3 U5.3 U5.4

## Other copper
Top Layer:
  rectangle net VCC: 60.706,89.789 63.754,93.853
  rectangle net VCC: 50.165,89.535 53.721,93.599
  rectangle net VCC: 39.878,89.535 43.434,93.599
  rectangle net VCC: 32.385,88.519 67.691,90.424
  rectangle net VCC: 32.385,93.442 67.691,95.504
  rectangle net VCC: 32.385,88.519 36.322,94.615
  rectangle net GND: 28.448,96.139 35.941,107.315
  rectangle net GND: 26.797,73.279 31.75,112.014
  rectangle net GND: 80.518,100.457 97.028,102.87
  rectangle net GND: 81.788,98.425 87.757,102.743
  rectangle net GND: 29.845,67.945 81.788,80.264
  rectangle net GND: 95.25,74.653 97.79,77.343
  rectangle net GND: 81.534,76.835 97.663,79.121
  rectangle net GND: 72.517,66.548 91.389,77.597
  rectangle net VCC: 63.5,89.154 67.691,100.584
  rectangle net VCC: 64.008,97.282 76.581,100.584
  rectangle net VCC: 72.517,97.282 76.581,110.744
  rectangle net VCC_RPP: 73.279,112.522 76.581,123.571
  rectangle net NetD1_C: 69.469,120.142 72.771,123.698
  rectangle net NetD1_C: 67.818,118.821 71.374,122.428
  rectangle net NetF1_2: 60.325,118.999 63.211,123.825
  rectangle net +VBAT: 53.34,120.777 57.658,126.111
  rectangle net +VBAT: 33.274,123.19 56.642,126.111
  rectangle net +VBAT: 33.274,115.951 38.481,126.111
  rectangle net +VBAT: 30.36,115.951 38.481,122.555
Bottom Layer:
  rectangle net GND: 71.501,124.333 87.122,127
  rectangle net GND: 66.929,126.111 75.057,127
  rectangle net GND: 36.449,124.841 66.929,127
  rectangle net GND: 26.797,105.283 38.481,115.316
  rectangle net GND: 36.449,109.728 43.434,126.365
  rectangle net GND: 61.214,104.902 65.913,110.871
  rectangle net GND: 39.751,109.601 81.407,115.57
  rectangle net GND: 27.051,93.599 36.322,106.68
  rectangle net GND: 78.994,100.203 99.695,105.156
  rectangle net GND: 75.184,103.632 85.344,113.03
  rectangle net GND: 29.845,66.675 91.186,80.137

## Silkscreen, mask and mechanical layers (free items; w line width, h text height)
Top Overlay:
  text "+3.3V" at 97.663,125.857 h1 r270
  text "+" at 30.353,123.825 h2
  text "-" at 30.099,106.426 h2
  text "VCC" at 92.71,93.853 h1
  text "VCC" at 27.559,90.17 h1
  text "+5V" at 92.913,89.535 h1
  text "+5V" at 27.178,86.106 h1
  text "+3.3V" at 92.71,85.217 h1
  text "+3.3V" at 26.162,81.915 h1
  text "GND" at 27.686,78.232 h1
  text "GND" at 98.128,77.724 h1
  text "GND" at 89.535,77.597 h1
  text "ALERT" at 87.63,75.057 h1
  text "GND" at 97.917,75.057 h1
  text "+3.3V" at 97.917,72.644 h1
  text "SCL" at 89.535,72.517 h1
  text "+3.3V" at 98.044,70.104 h1
  text "SDA" at 89.535,69.977 h1

## Text inside footprints (layer, text, board x,y; h text height)
P3: Top Overlay "3" at 96.266,126.238 h1.27 r90; Top Overlay "4" at 93.726,126.238 h1.27 r90; Top Overlay "2" at 93.726,119.634 h1.27 r90; Top Overlay "1" at 96.266,120.142 h1.27 r90
PN: Top Overlay "2" at 94.234,67.691 h1.27 r90; Top Overlay "1" at 96.774,68.199 h1.27 r90